# Altium PCB PCB1.PcbDoc
Units mm, origin at the board's own origin, x right, y up, seen from the top; angles counter-clockwise.
Board outline 152.4 x 101.6 mm, 2 copper layers (Top Layer, Bottom Layer); 129 components, 126 nets, 325 pads, 0 vias.
Unrouted connection lines stored in the file: 187.
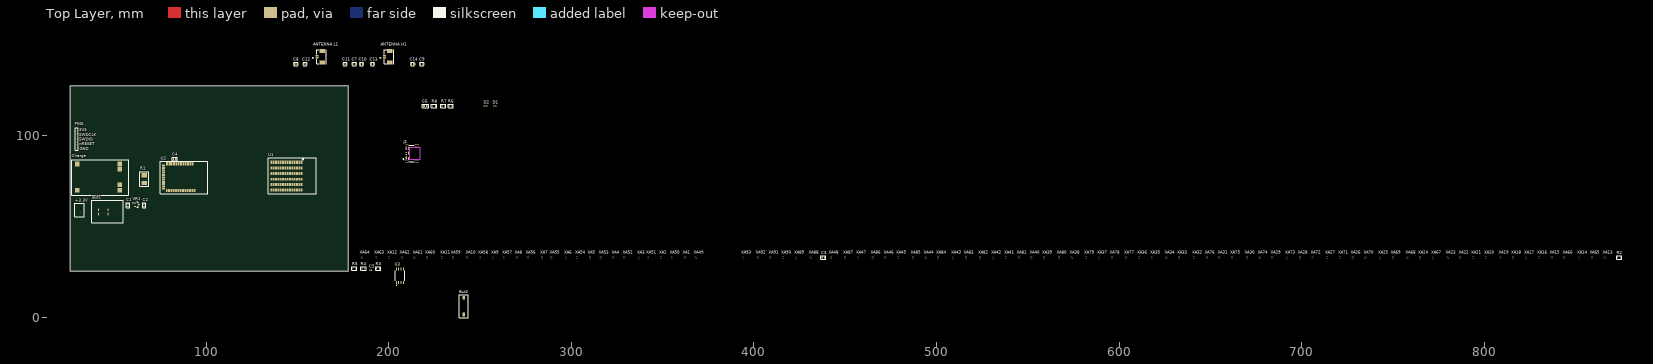
[diagram p0: Top Layer view]
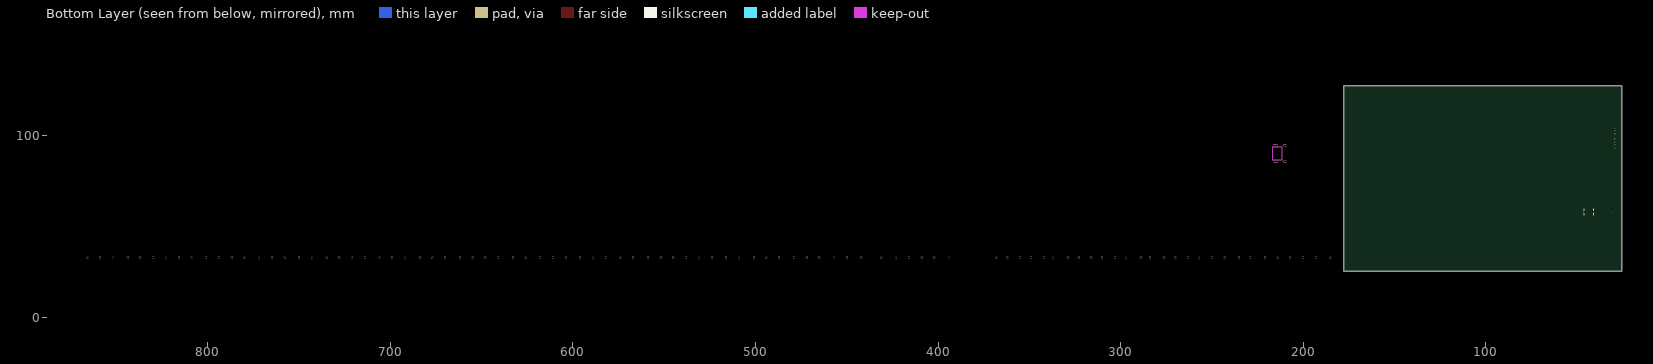
[diagram p1: Bottom Layer view, seen from below]

## Layer stack, top to bottom
Top Solder: solder mask 0.0254, SM-001, Dk 4
Top Layer: signal copper 0.018
Dielectric 1: prepreg 0.32, FR-4, Dk 4.8
Bottom Layer: signal copper 0.018
Bottom Solder: solder mask 0.0254, SM-001, Dk 4

## Board outline
25.4,25.4 177.8,25.4 177.8,127 25.4,127

## Design rules (kind name [scope] priority, off if disabled: settings)
AcuteAngle [All] p1: minimum=3.50000000000000E+0001 checktracksonly=FALSE
BoardOutlineClearance "BoardOutlineClearance 1" [All] p1: gap=0.25 ignorepadtopadclearanceinfootprint=FALSE except(0: Arc-SplitContinuation Track-SplitContinuation SMDPad-SplitContinuation THPad-SplitContinuation Via-SplitContinuation Fill-SplitContinuation Poly-SplitContinuation Region-SplitContinuation Text-SplitContinuation) // Milling
BoardOutlineClearance "BoardOutlineClearance 2" [All] p2 off: gap=0.4 ignorepadtopadclearanceinfootprint=FALSE except(0: Arc-SplitContinuation Track-SplitContinuation SMDPad-SplitContinuation THPad-SplitContinuation Via-SplitContinuation Fill-SplitContinuation Poly-SplitContinuation Region-SplitContinuation Text-SplitContinuation) // V-Cut
Clearance "Clearance-1 1/2 Oz" [All] p1: gap=0.125 ignorepadtopadclearanceinfootprint=FALSE except(0.2: Arc-Fill Arc-Poly Track-Fill Track-Poly SMDPad-SMDPad SMDPad-Fill SMDPad-Poly THPad-Fill THPad-Poly Via-Fill Via-Poly Fill-Fill Fill-Poly Poly-Poly Poly-Region Poly-Text; 0.25: Arc-Hole Track-Hole SMDPad-Hole THPad-Hole Via-Hole Fill-Hole Poly-Hole Region-Hole Text-Hole) // Standart
Clearance "Clearance-2 1/2 Oz" [All] p2 off: gap=0.1 ignorepadtopadclearanceinfootprint=FALSE except(0.15: Arc-Fill Arc-Poly Track-Fill Track-Poly SMDPad-SMDPad SMDPad-Fill SMDPad-Poly THPad-Fill THPad-Poly Via-Fill Via-Poly Fill-Fill Fill-Poly Poly-Poly Poly-Region Poly-Text; 0.25: Arc-Hole Track-Hole SMDPad-Hole THPad-Hole Via-Hole Fill-Hole Poly-Hole Region-Hole Text-Hole) // Advance
DiffPairsRouting "DiffPairsRouting 1 Oz" [All] p1: maxlimit=0.254 minlimit=0.2 mostfreqgap=0.254 toplayer_minwidth=0.2 toplayer_maxwidth=0.381 toplayer_prefwidth=0.381 bottomlayer_minwidth=0.2 bottomlayer_maxwidth=0.381 bottomlayer_prefwidth=0.381 maxuncoupledlength=12.7
DiffPairsRouting "DiffPairsRouting 1/2 Oz" [All] p2: maxlimit=0.254 minlimit=0.1 mostfreqgap=0.254 toplayer_minwidth=0.1 toplayer_maxwidth=0.381 toplayer_prefwidth=0.381 bottomlayer_minwidth=0.1 bottomlayer_maxwidth=0.381 bottomlayer_prefwidth=0.381 maxuncoupledlength=12.7
HoleSize "Minimum HoleSize" [IsPad] p1: absolutevalues=TRUE maxlimit=5.9 minlimit=0.6 maxpercent=80.000 minpercent=20.000
HoleSize "Minimum HoleSize VIA 1" [IsVia] p2: absolutevalues=TRUE maxlimit=5.9 minlimit=0.3 maxpercent=80.000 minpercent=20.000 // Standart
HoleSize "Minimum HoleSize VIA 2" [IsVia] p3 off: absolutevalues=TRUE maxlimit=5.9 minlimit=0.2 maxpercent=80.000 minpercent=20.000 // Advance
HoleToHoleClearance Hole2HoleClearance [All] p1: gap=0.25 allowstackedmicrovias=FALSE
MinimumAnnularRing "Minimum AR VIA Standart" [IsVia] p1: minimumring=0.15
MinimumAnnularRing "Minimum AR PAD Standart" [IsPAD] p2: minimumring=0.2
MinimumAnnularRing "Minimum AR VIA Advance" [IsVia] p3 off: minimumring=0.1
MinimumAnnularRing "Minimum AR PAD Advance" [IsPAD] p4 off: minimumring=0.15
MinimumSolderMaskSliver "SolderMask Bridge Standart" [All] p1: minsoldermaskwidth=0.15 // All Masks
MinimumSolderMaskSliver "SolderMask Bridge Advance" [All] p2 off: minsoldermaskwidth=0.1 // Mask LDI
PlaneClearance "PlaneClearance-1 1/2 Oz" [All] p1: clearance=0.2 // Standart
PlaneClearance "PlaneClearance-2 1/2 Oz" [All] p2 off: clearance=0.15 // Advance
PlaneConnect "TermalConnect-1 1/2 Oz" [All] p1: planeconnectstyle=Relief reliefexpansion=0.2 reliefentries=4 reliefconductorwidth=0.2 reliefairgap=0.2 // Standart
PlaneConnect "TermalConnect-2 1/2 Oz" [All] p2 off: pad.planeconnectstyle=Relief pad.reliefexpansion=0.15 pad.reliefentries=4 pad.reliefconductorwidth=0.15 pad.reliefairgap=0.15 via.planeconnectstyle=Direct via.reliefexpansion=0.15 via.reliefentries=4 via.reliefconductorwidth=0.15 via.reliefairgap=0.15 // Advance
PolygonConnect "PolygonConnect-1 1/2 Oz" [All] p1: thpad.connectstyle=Relief thpad.reliefconductorwidth=0.15 thpad.reliefentries=4 thpad.polygonreliefangle="90 Angle" thpad.airgapwidth=0.2 smdpad.connectstyle=Relief smdpad.reliefconductorwidth=0.2 smdpad.reliefentries=4 smdpad.polygonreliefangle="90 Angle" smdpad.airgapwidth=0.2 via.connectstyle=Direct via.reliefconductorwidth=0.254 via.reliefentries=4 via.polygonreliefangle="90 Angle" via.airgapwidth=0.254 // Standart
PolygonConnect "PolygonConnect-2 1/2 Oz" [All] p2 off: thpad.connectstyle=Relief thpad.reliefconductorwidth=0.125 thpad.reliefentries=4 thpad.polygonreliefangle="90 Angle" thpad.airgapwidth=0.15 smdpad.connectstyle=Relief smdpad.reliefconductorwidth=0.125 smdpad.reliefentries=4 smdpad.polygonreliefangle="90 Angle" smdpad.airgapwidth=0.15 via.connectstyle=Direct via.reliefconductorwidth=0.254 via.reliefentries=4 via.polygonreliefangle="90 Angle" via.airgapwidth=0.254 // Advance
RoutingCorners [All] p1 off: cornerstyle=45-Degree minsetback=2.54 maxsetback=2.54
RoutingVias [All] p1: holewidth=0.3 width=0.6 viastyle="Through Hole" minholewidth=0.3 minwidth=0.6 maxholewidth=5.9 maxwidth=6.4
SilkToSilkClearance Silk2SilkClearance [All] p1 off: silktosilkclearance=0.15
SilkToSolderMaskClearance Silk2SolderMaskClearance [IsPad] p1 off: minsilkscreentomaskgap=0.15 clearancetoexposedcopper=TRUE
SolderMaskExpansion SolderMaskExpansion-1 [All] p1: expansion=0.05 istentingtop=FALSE // Standart
SolderMaskExpansion "SolderMaskExpansion LDI" [All] p2 off: expansion=0.025 istentingtop=FALSE // Advance
SupplyNets "Schematic Supply Nets" [InNet('GND')] p1: voltage=0.000
UnRoutedNet [All] p1: checkbadconnections=TRUE
Width "Width 1/2 Oz" [All] p1: maxlimit=10 minlimit=0.125 preferedwidth=0.125 minimp=50.000000 maximp=50.000000 favimp=50.000000 checkconnectedcopper=TRUE
20 further rules are at their usual default settings.

## Classes and differential pairs
differential pair class USB: DATA
component class U?: +3.3V But1 C1 C2 Charge R1 VR1
differential pair DATA: +DATA_P -DATA_N

## Components (designator, comment, footprint, x,y, rotation, side; value= is the part's Value field where it differs from the comment)
+3.3V "Battery" "Battery connect" 30.473,59.004 r90 top
"ANTENNA H1" "MOLEX 532610271" MOLEX_532610271 200,143.001 r90 top
"ANTENNA L1" "MOLEX 532610271" MOLEX_532610271 163,143.001 r90 top
But1 "SMRS-101-1C2" Button 43.5,58 r0 top
But2 "RES BUT" "RES BUT" 241,6.377 r90 top
C1 "10 мкФ" "Murata GRM21BR60J106K" 57,61.65 r270 top
C2 "10 мкФ" "Murata GRM21BR60J106K" 66,61.65 r270 top
C3 "100 пФ" "Murata GRM2165C1H101J" 438,33 r0 top
C4 "100 пФ" "Murata GRM2165C1H101J" 82.65,87 r180 top
C5 "100 нФ" CAPC1005X22N 190,26 r0 top
C6 "4.7 нФ" "WURTH 885012206012" 220,116.001 r0 top
C7 "TBD" CAPC2012X88N 181,139.001 r0 top
C8 "TBD" CAPC2012X88N 149,139.001 r0 top
C9 "TBD" CAPC2012X88N 218,139.001 r0 top
C10 "TBD" CAPC2012X88N 185,139.001 r0 top
C11 "TBD" CAPC2012X88N 176,139.001 r0 top
C12 "TBD" CAPC2012X88N 154,139.001 r0 top
C13 "TBD" CAPC2012X88N 191,139.001 r0 top
C14 "TBD" CAPC2012X88N 213,139.001 r0 top
Charge "TP4056" TP4056 41,77 r270 top
D1 "PESD0402-140" DIO_PESD0402-140 258,116.001 r0 top
D2 "PESD0402-140" DIO_PESD0402-140 253,116.001 r0 top
J1 "USB-C 1054500101" MOLEX_1054500101 217,90 r90 top
PINS "PLS-4" "PLS-4 (DS-1021-1x4)" 29,98 r270 top
R1 "0.001 Ом" "Resistor 0.001" 66,76 r90 top
R2 "10 кОм" "Yageo RC0805JR-0710KL" 874,33 r0 top
R3 "10 кОм" "Yageo RC0805JR-0710KL" 194,27 r0 top
R4 "22 Ом" CR0805-JW-220ELF 186,27 r0 top
R5 "10 кОм" "Yageo RC0805JR-0710KL" 181,27 r0 top
R6 "5.1 кОм" RC0805FR-075K1L 233,116.001 r0 top
R7 "5.1 кОм" RC0805FR-075K1L 229,116.001 r0 top
R8 "1 МОм" RC0805FR-071ML 224,116.001 r0 top
U1 "HOLYIOT NRF54H20" "HOLYIOT NRF54H20" 143.905,77.549 r270 top
U2 "HOLYIOT NRF54L15" "HOLYIOT NRF54L15" 85,77 r270 top
U3 "W25Q128FVSIG" SOIC127P790X216-8N 206,23 r90 top
VR1 "MCP1700T-3302E_TT" SOT95P237X112-3N 62,62 r0 top
XA1 "PLS-1 (Ningbo Xinlaiya)" PLS-1 362,33 r0 top
XA2 "PLS-1 (Ningbo Xinlaiya)" PLS-1 349,33 r0 top
XA3 "PLS-1 (Ningbo Xinlaiya)" PLS-1 337,33 r0 top
XA4 "PLS-1 (Ningbo Xinlaiya)" PLS-1 323,33 r0 top
XA5 "PLS-1 (Ningbo Xinlaiya)" PLS-1 310,33 r0 top
XA6 "PLS-1 (Ningbo Xinlaiya)" PLS-1 297,33 r0 top
XA7 "PLS-1 (Ningbo Xinlaiya)" PLS-1 284,33 r0 top
XA8 "PLS-1 (Ningbo Xinlaiya)" PLS-1 270,33 r0 top
XA9 "PLS-1 (Ningbo Xinlaiya)" PLS-1 257,33 r0 top
XA10 "PLS-1 (Ningbo Xinlaiya)" PLS-1 243,33 r90 top
XA11 "PLS-1 (Ningbo Xinlaiya)" PLS-1 229,33 r90 top
XA12 "PLS-1 (Ningbo Xinlaiya)" PLS-1 200,33 r90 top
XA13 "PLS-1 (Ningbo Xinlaiya)" PLS-1 866,33 r90 top
XA14 "PLS-1 (Ningbo Xinlaiya)" PLS-1 852,33 r90 top
XA15 "PLS-1 (Ningbo Xinlaiya)" PLS-1 837,33 r90 top
XA16 "PLS-1 (Ningbo Xinlaiya)" PLS-1 830,33 r90 top
XA17 "PLS-1 (Ningbo Xinlaiya)" PLS-1 823,33 r90 top
XA18 "PLS-1 (Ningbo Xinlaiya)" PLS-1 816,33 r90 top
XA19 "PLS-1 (Ningbo Xinlaiya)" PLS-1 809,33 r90 top
XA20 "PLS-1 (Ningbo Xinlaiya)" PLS-1 801,33 r90 top
XA21 "PLS-1 (Ningbo Xinlaiya)" PLS-1 794,33 r90 top
XA22 "PLS-1 (Ningbo Xinlaiya)" PLS-1 787,33 r90 top
XA23 "PLS-1 (Ningbo Xinlaiya)" PLS-1 780,33 r90 top
XA24 "PLS-1 (Ningbo Xinlaiya)" PLS-1 765,33 r90 top
XA25 "PLS-1 (Ningbo Xinlaiya)" PLS-1 743,33 r90 top
XA26 "PLS-1 (Ningbo Xinlaiya)" PLS-1 728,33 r90 top
XA27 "PLS-1 (Ningbo Xinlaiya)" PLS-1 714,33 r90 top
XA28 "PLS-1 (Ningbo Xinlaiya)" PLS-1 699,33 r90 top
XA29 "PLS-1 (Ningbo Xinlaiya)" PLS-1 684,33 r90 top
XA30 "PLS-1 (Ningbo Xinlaiya)" PLS-1 670,33 r90 top
XA31 "PLS-1 (Ningbo Xinlaiya)" PLS-1 655,33 r90 top
XA32 "PLS-1 (Ningbo Xinlaiya)" PLS-1 641,33 r90 top
XA33 "PLS-1 (Ningbo Xinlaiya)" PLS-1 633,33 r90 top
XA34 "PLS-1 (Ningbo Xinlaiya)" PLS-1 626,33 r90 top
XA35 "PLS-1 (Ningbo Xinlaiya)" PLS-1 618,33 r90 top
XA36 "PLS-1 (Ningbo Xinlaiya)" PLS-1 611,33 r90 top
XA37 "PLS-1 (Ningbo Xinlaiya)" PLS-1 589,33 r90 top
XA38 "PLS-1 (Ningbo Xinlaiya)" PLS-1 574,33 r90 top
XA39 "PLS-1 (Ningbo Xinlaiya)" PLS-1 559,33 r90 top
XA40 "PLS-1 (Ningbo Xinlaiya)" PLS-1 552,33 r90 top
XA41 "PLS-1 (Ningbo Xinlaiya)" PLS-1 538,33 r90 top
XA42 "PLS-1 (Ningbo Xinlaiya)" PLS-1 531,33 r90 top
XA43 "PLS-1 (Ningbo Xinlaiya)" PLS-1 509,33 r90 top
XA44 "PLS-1 (Ningbo Xinlaiya)" PLS-1 494,33 r90 top
XA45 "PLS-1 (Ningbo Xinlaiya)" PLS-1 479,33 r90 top
XA46 "PLS-1 (Ningbo Xinlaiya)" PLS-1 472,33 r90 top
XA47 "PLS-1 (Ningbo Xinlaiya)" PLS-1 457,33 r90 top
XA48 "PLS-1 (Ningbo Xinlaiya)" PLS-1 442,33 r90 top
XA49 "PLS-1 (Ningbo Xinlaiya)" PLS-1 368,33 r90 top
XA50 "PLS-1 (Ningbo Xinlaiya)" PLS-1 355,33 r90 top
XA51 "PLS-1 (Ningbo Xinlaiya)" PLS-1 342,33 r90 top
XA52 "PLS-1 (Ningbo Xinlaiya)" PLS-1 329,33 r90 top
XA53 "PLS-1 (Ningbo Xinlaiya)" PLS-1 316,33 r90 top
XA54 "PLS-1 (Ningbo Xinlaiya)" PLS-1 303,33 r90 top
XA55 "PLS-1 (Ningbo Xinlaiya)" PLS-1 289,33 r90 top
XA56 "PLS-1 (Ningbo Xinlaiya)" PLS-1 276,33 r90 top
XA57 "PLS-1 (Ningbo Xinlaiya)" PLS-1 263,33 r90 top
XA58 "PLS-1 (Ningbo Xinlaiya)" PLS-1 250,33 r90 top
XA59 "PLS-1 (Ningbo Xinlaiya)" PLS-1 235,33 r90 top
XA60 "PLS-1 (Ningbo Xinlaiya)" PLS-1 221,33 r90 top
XA61 "PLS-1 (Ningbo Xinlaiya)" PLS-1 214,33 r90 top
XA62 "PLS-1 (Ningbo Xinlaiya)" PLS-1 207,33 r90 top
XA63 "PLS-1 (Ningbo Xinlaiya)" PLS-1 193,33 r90 top
XA64 "PLS-1 (Ningbo Xinlaiya)" PLS-1 185,33 r90 top
XA65 "PLS-1 (Ningbo Xinlaiya)" PLS-1 859,33 r90 top
XA66 "PLS-1 (Ningbo Xinlaiya)" PLS-1 844,33 r90 top
XA67 "PLS-1 (Ningbo Xinlaiya)" PLS-1 772,33 r90 top
XA68 "PLS-1 (Ningbo Xinlaiya)" PLS-1 758,33 r90 top
XA69 "PLS-1 (Ningbo Xinlaiya)" PLS-1 750,33 r90 top
XA70 "PLS-1 (Ningbo Xinlaiya)" PLS-1 735,33 r90 top
XA71 "PLS-1 (Ningbo Xinlaiya)" PLS-1 721,33 r90 top
XA72 "PLS-1 (Ningbo Xinlaiya)" PLS-1 706,33 r90 top
XA73 "PLS-1 (Ningbo Xinlaiya)" PLS-1 692,33 r90 top
XA74 "PLS-1 (Ningbo Xinlaiya)" PLS-1 677,33 r90 top
XA75 "PLS-1 (Ningbo Xinlaiya)" PLS-1 662,33 r90 top
XA76 "PLS-1 (Ningbo Xinlaiya)" PLS-1 648,33 r90 top
XA77 "PLS-1 (Ningbo Xinlaiya)" PLS-1 604,33 r90 top
XA78 "PLS-1 (Ningbo Xinlaiya)" PLS-1 596,33 r90 top
XA79 "PLS-1 (Ningbo Xinlaiya)" PLS-1 582,33 r90 top
XA80 "PLS-1 (Ningbo Xinlaiya)" PLS-1 567,33 r90 top
XA81 "PLS-1 (Ningbo Xinlaiya)" PLS-1 545,33 r90 top
XA82 "PLS-1 (Ningbo Xinlaiya)" PLS-1 524,33 r90 top
XA83 "PLS-1 (Ningbo Xinlaiya)" PLS-1 516,33 r90 top
XA84 "PLS-1 (Ningbo Xinlaiya)" PLS-1 501,33 r90 top
XA85 "PLS-1 (Ningbo Xinlaiya)" PLS-1 487,33 r90 top
XA86 "PLS-1 (Ningbo Xinlaiya)" PLS-1 465,33 r90 top
XA87 "PLS-1 (Ningbo Xinlaiya)" PLS-1 450,33 r90 top
XA88 "PLS-1 (Ningbo Xinlaiya)" PLS-1 431,33 r90 top
XA89 "PLS-1 (Ningbo Xinlaiya)" PLS-1 423,33 r90 top
XA90 "PLS-1 (Ningbo Xinlaiya)" PLS-1 416,33 r90 top
XA91 "PLS-1 (Ningbo Xinlaiya)" PLS-1 409,33 r90 top
XA92 "PLS-1 (Ningbo Xinlaiya)" PLS-1 402,33 r90 top
XA93 "PLS-1 (Ningbo Xinlaiya)" PLS-1 394,33 r90 top

## Footprints (in the part's own frame and the unit in brackets; to place one, negate y for a bottom-side part, rotate by r counter-clockwise, add the part's x,y. Pads: shape width x height; smd on the part's side, far side on the other; paste and mask are expansions set on the pad)
"Battery connect" [mm]
  round 0.5 hole 0.5: 1(-1,-0.5) 2(0.996,-0.527)
  silkscreen extent -3.75,-2.75 3.75,2.5, body extent -2.95,-2.25 2.95,2.25, height 6.2
Button [mm] "SMRS-101-1C2"
  rect 0.6x3.7 hole 0.6 square: 1(-2.5,0) 2(2.5,0)
  silkscreen extent -6.25,-6 11,6.25, body extent -5.1,-5.25 10.1,5.25, height 13.6
CAPC1005X22N [mm]
  rect 0.54x0.6 smd paste+0 mask+0.102: 1(-0.432,0) 2(0.432,0)
  body extent -0.5,-0.25 0.5,0.25, height 0.2
CAPC2012X88N [mm]
  rrect25% 1.16x1.47 smd: 1(-0.875,0) 2(0.875,0)
  silkscreen extent -1,-0.91 1,0.91, body extent -1,-0.63 1,0.63, height 1.1
CR0805-JW-220ELF [mm]
  rect 0.4x1.25 smd: 1(-0.8,0) 2(0.8,0)
  silkscreen extent -1.55,-1 1.7,1, body extent -1.02,-0.62 0.98,0.63, height 0.6
DIO_PESD0402-140 [mm]
  rect 0.85x0.65 smd paste+0 mask+0.102: 1(-0.625,0) 2(0.625,0)
  body extent -0.5,-0.25 0.5,0.25, height 0.43
"HOLYIOT NRF54H20" [mm]
  rect 1.8x1 smd: 1(-7.6,8.255) 2(-7.6,6.985) 3(-7.6,5.715) 4(-7.6,4.445) 5(-7.6,3.175) 6(-7.6,1.905) 7(-7.6,0.635) 8(-7.6,-0.635) 9(-7.6,-1.905) 10(-7.6,-3.175) 11(-7.6,-4.445) 12(-7.6,-5.715) 13(-7.6,-6.985) 14(-7.6,-8.255) 15(-4.45,-8.255) 16(-4.45,-6.985) 17(-4.45,-5.715) 18(-4.45,-4.445) 19(-4.45,-3.175) 20(-4.45,-1.905) 21(-4.45,-0.635) 22(-4.45,0.635) 23(-4.45,1.905) 24(-4.45,3.175) 25(-4.45,4.445) 26(-4.45,5.715) 27(-4.45,6.985) 28(-4.45,8.255) 57(4.525,8.255) 58(4.525,6.985) 59(4.525,5.715) 60(4.525,4.445) 61(4.525,3.175) 62(4.525,1.905) 63(4.525,0.635) 64(4.525,-0.635) 65(4.525,-1.905) 66(4.525,-3.175) 67(4.525,-4.445) 68(4.525,-5.715) 69(4.525,-6.985) 70(4.525,-8.255) 71(7.6,-8.255) 72(7.6,-6.985) 73(7.6,-5.715) 74(7.6,-4.445) 75(7.6,-3.175) 76(7.6,-1.905) 77(7.6,-0.635) 78(7.6,0.635) 79(7.6,1.905) 80(7.6,3.175) 81(7.6,4.445) 82(7.6,5.715) 83(7.6,6.985) 84(7.6,8.255)
  rect 1.5x1 smd: 29(-1.451,8.255) 30(-1.451,6.985) 31(-1.451,5.715) 32(-1.451,4.445) 33(-1.451,3.175) 34(-1.451,1.905) 35(-1.451,0.635) 36(-1.451,-0.635) 37(-1.451,-1.905) 38(-1.451,-3.175) 39(-1.451,-4.445) 40(-1.451,-5.715) 41(-1.451,-6.985) 42(-1.451,-8.255) 43(1.674,-8.255) 44(1.674,-6.985) 45(1.674,-5.715) 46(1.674,-4.445) 47(1.674,-3.175) 48(1.674,-1.905) 49(1.674,-0.635) 50(1.674,0.635) 51(1.674,1.905) 52(1.674,3.175) 53(1.674,4.445) 54(1.674,5.715) 55(1.674,6.985) 56(1.674,8.255)
  silkscreen extent -10,-10 9.5,16.25, body extent -8.26,-9.25 8.26,15.25, height 2.89
"HOLYIOT NRF54L15" [mm]
  rect 1.8x1 smd: 1(-7.32,7.412) 2(-7.32,6.142) 3(-7.32,4.872) 4(-7.32,3.602) 5(-7.32,2.332) 6(-7.32,1.062) 7(-7.32,-0.208) 8(-7.32,-1.478) 9(-7.32,-2.748) 10(-7.32,-4.018) 11(-7.32,-5.288) 12(-7.32,-6.558) 24(7.32,-6.753) 25(7.32,-5.478) 26(7.32,-4.208) 27(7.32,-2.938) 28(7.32,-1.668) 29(7.32,-0.398) 30(7.32,0.872) 31(7.32,2.142) 32(7.32,3.412) 33(7.32,4.682) 34(7.32,5.952) 35(7.32,7.222) 36(7.32,8.492)
  rect 1x1.8 smd: 13(-6.355,-8.492) 14(-5.08,-8.492) 15(-3.81,-8.492) 16(-2.54,-8.492) 17(-1.27,-8.492) 18(0,-8.492) 19(1.27,-8.492) 20(2.54,-8.492) 21(3.81,-8.492) 22(5.08,-8.492) 23(6.345,-8.492)
  silkscreen extent -8.65,-10.15 8.95,15.65, body extent -7.84,-8.97 7.79,15.07, height 2.43
MOLEX_532610271 [mm]
  rect 0.8x1.6 smd mask+0.076: 1(-0.625,2.4) 2(0.625,2.4)
  rect 2.1x3 smd mask+0.076: S1(-3.175,-0.5) S2(3.175,-0.5)
  silkscreen extent -3.83,-2.6 3.83,4.64
MOLEX_1054500101 [mm]
  rect 0.298x0.7 smd mask+0.064: A1(-3,7.54) A2(-2.5,7.54) A3(-2,7.54) A4(-1.5,7.54) A5(-1,7.54) A6(-0.5,7.54) A7(0.5,7.54) A8(1,7.54) A9(1.5,7.54) A10(2,7.54) A11(2.5,7.54) A12(3,7.54) B2(2.25,6.24) B3(1.75,6.24) B4(1.25,6.24) B5(0.75,6.24) B6(0.25,6.24) B7(-0.25,6.24) B8(-0.75,6.24) B9(-1.25,6.24) B10(-1.75,6.24) B11(-2.25,6.24)
  rect 0.998x0.7 smd mask+0.064: B1(3.1,6.24) B12(-3.1,6.24)
  oval 1.036x2.1 hole 0.6 slot 1.6 at 90 deg mask+0.064: SH1(-4.32,7.13) SH2(4.32,7.13)
  oval 1.1x2.6 hole 0.6 slot 2.1 at 90 deg mask+0.064: SH3(-4.32,1.77) SH4(4.32,1.77)
  Keep-Out Layer region: 3.5,0 -3.5,0 -3.5,5.65 3.5,5.65
  silkscreen extent -4.62,3.42 4.62,9.45
"Murata GRM21BR60J106K" [mm]
  rect 0.7x1.25 smd: 1(-0.65,0) 2(0.65,0)
  silkscreen extent -1.35,-0.9 1.35,0.9, body extent -1,-0.7 1,0.75, height 1.24
"Murata GRM2165C1H101J" [mm]
  rect 0.7x1.25 smd: 1(-0.65,0) 2(0.65,0)
  silkscreen extent -1.3,-0.9 1.4,0.9, body extent -1,-0.7 1,0.75, height 1.24
PLS-1 [mm]
  round 1.02 hole 1.02: 1(0,0)
  body extent -1.27,-1.27 1.27,1.27, height 16.06
"PLS-4 (DS-1021-1x4)" [mm]
  round 1.02 hole 1.02: 1(-5.08,0) 2(-2.54,0) 3(0,0) 4(2.54,0) 5(5.08,0)
  silkscreen extent -6.08,-0.9 6.29,0.88, body extent -6.4,-1.26 6.3,1.28, height 8.6
RC0805FR-071ML [mm]
  rect 0.4x1.25 smd: 1(0,0) 2(1.6,0)
  silkscreen extent -0.75,-1 2.25,1, body extent -0.2,-0.61 1.8,0.64, height 0.6
RC0805FR-075K1L [mm]
  rect 0.4x1.25 smd: 1(0,0) 2(1.6,0)
  silkscreen extent -0.5,-1 2.25,1, body extent -0.21,-0.64 1.79,0.61, height 0.6
"RES BUT" [mm]
  rect 2.1x1.6 smd: 1(-4.55,0) 2(4.55,0)
  silkscreen extent -6.25,-2.5 6.25,2.5, body extent -4.98,-1.75 4.98,1.75, height 4.4
"Resistor 0.001" [mm]
  rect 2.21x3.18 smd: 1(-2.07,0) 2(2.07,0)
  silkscreen extent -4.08,-2.5 4.09,2.5, body extent -3.17,-1.59 3.17,1.59, height 0.88
SOIC127P790X216-8N [mm]
  rrect25% 1.61x0.58 smd: 1(-3.605,1.905) 2(-3.605,0.635) 3(-3.605,-0.635) 4(-3.605,-1.905) 5(3.605,-1.905) 6(3.605,-0.635) 7(3.605,0.635) 8(3.605,1.905)
  silkscreen extent -5.31,-2.64 2.64,2.64, body extent -3.95,-2.64 3.95,2.64, height 2.16
SOT95P237X112-3N [mm]
  rrect25% 1.22x0.62 smd: 1(-1.065,0.95) 2(-1.065,-0.95) 3(1.065,0)
  silkscreen extent -2.46,-1.43 0.64,1.43, body extent -1.18,-1.45 1.18,1.45, height 1.12
TP4056 [mm]
  rect 2.5x2.5 smd: 1(-7.25,11.625) 2(-4.25,11.625) 3(4.25,11.625) 4(7.25,11.625) 5(-7.25,-11.625) 6(7.25,-11.625)
  silkscreen extent -9.5,-14.87 9.75,16.13, body extent -8.7,-14.17 8.7,15.13, height 4.14
"WURTH 885012206012" [mm] "Chip Capacitor, 2-Leads, Body 1,60x0,80mm, IPC Medium Density"
  rect 0.9x0.95 smd: 1(-0.775,0) 2(0.775,0)
  silkscreen extent -1.75,-1 1.75,1, body extent -0.8,-0.4 0.8,0.4, height 0.6
"Yageo RC0805JR-0710KL" [mm]
  rect 0.25x1.25 smd: 1(-0.825,0) 2(0.825,0)
  silkscreen extent -1.32,-1 1.43,1, body extent -1,-0.63 1,0.63, height 0.6

## Part data
"ANTENNA H1" "ANTENNA L1": library part 532610271, "Connector Header Surface Mount, Right Angle 2 position 0.049 (1.25mm)", Package=None, Availability="In Stock", Check_prices=https://www.snapeda.com/parts/532610271/Molex/view-part/?ref=eda, MF=Molex, MP=532610271, Price=None, Purchase-URL=https://pricing.snapeda.com/search/part/532610271/?ref=eda, SnapEDA_Link=https://www.snapeda.com/parts/532610271/Molex/view-part/?ref=snap
But1: library part Button
C1 C2: library part "Murata GRM21BR60J106K", "Murata GRM21BR60J106K"
C3 C4: library part "Murata GRM2165C1H101J", "Murata GRM2165C1H101J"
C5: library part GRM152R60J104KE19D, "SMD Capacitor X5R(EIA) with Capacitance: 0.10uF Tol. 10%. Rated Voltage: 6.3Vdc", Package="1005 Murata", Check_prices=https://www.snapeda.com/parts/GRM152R60J104KE19D/Murata/view-part/?ref=eda, MF=Murata, MP=GRM152R60J104KE19D, SnapEDA_Link=https://www.snapeda.com/parts/GRM152R60J104KE19D/Murata/view-part/?ref=snap
C6: library part "WURTH 885012206012"
C7 C8 C9 C10 C11 C12 C13 C14: library part C0805C473K1RACTU, "0805 C0G/NP0 ceramic capacitor for nfc fix", Package="805-2 KEMET", Check_prices=https://www.snapeda.com/parts/C0805C473K1RACTU/KEMET/view-part/?ref=eda, MF=KEMET, MP=C0805C473K1RACTU, SnapEDA_Link=https://www.snapeda.com/parts/C0805C473K1RACTU/KEMET/view-part/?ref=snap
D1 D2: "40V Clamp - Ipp Tvs Diode Surface Mount 0402", Package="0402 Littelfuse Inc.", Check_prices=https://www.snapeda.com/parts/PESD0402-140/Littelfuse/view-part/?ref=eda, MF="Littelfuse Inc.", MP=PESD0402-140, SnapEDA_Link=https://www.snapeda.com/parts/PESD0402-140/Littelfuse/view-part/?ref=snap
J1: library part 1054500101, "USB-C (USB TYPE-C) USB 3.2 Gen 2 (USB 3.1 Gen 2, Superspeed + (USB 3.1)) Receptacle Connector 24 Position Surface Mount, Right Angle; Through Hole", Package=None, Check_prices=https://www.snapeda.com/parts/1054500101/Molex/view-part/?ref=eda, MF=Molex, MP=1054500101, SnapEDA_Link=https://www.snapeda.com/parts/1054500101/Molex/view-part/?ref=snap
PINS: library part "PLS-4 (DS-1021-1x4)"
R1: library part "YAGEO PA2512FKF7W0R001E"
R2 R3 R5: library part "Yageo RC0805JR-0710KL"
R4: library part CR0805-JW-220ELF
R6 R7: library part RC0805FR-075K1L
R8: library part RC0805FR-071ML
U3: library part W25Q128JVSIQ, "FLASH - NOR Memory IC 128Mb (16M x 8) SPI - Quad I/O, QPI, DTR 133 MHz 8-SOIC", Package="SOIC-8 Winbond Electronics", Check_prices=https://www.snapeda.com/parts/W25Q128JVSIQ/Winbond/view-part/?ref=eda, MF="Winbond Electronics", MP=W25Q128JVSIQ, SnapEDA_Link=https://www.snapeda.com/parts/W25Q128JVSIQ/Winbond/view-part/?ref=snap
VR1: "Pwr Sply Func,Voltage Regulator,LDO,SOT-23,PD 369.6mW,VO 3.3V,Regline +/-0.75%/V", Package="SOT-23 Microchip", Check_prices=https://www.snapeda.com/parts/MCP1700T-3302E/TT/Microchip/view-part/?ref=eda, MF=Microchip, MP=MCP1700T-3302E/TT, SnapEDA_Link=https://www.snapeda.com/parts/MCP1700T-3302E/TT/Microchip/view-part/?ref=snap

## Nets (pads, with @x,y where several pads share a name; then routed paths per layer and width w, separated by ;. In a path a pad name is that pad's centre, name@x,y a point inside that pad or via, vN(x,y) a via of type N, cw(c..) or ccw(c..) an arc to the next point about the centre after c; other vN are vias at no path point)
DATA_N: D1.1 J1.A7 J1.B7 U1.78
DATA_P: D2.1 J1.A6 J1.B6 U1.79
GND: "ANTENNA H1.S1" "ANTENNA H1.S2" "ANTENNA L1.S1" "ANTENNA L1.S2" C1.1 C2.1 C3.1 C4.1 C5.1 C6.1 C7.1 C8.2 C9.1 C10.2 Charge.4 D1.2 D2.2 J1.A1 J1.A12 J1.B1 J1.B12 PINS.5 R6.1 R7.2 R8.2 U1.1 U1.4 U1.28 U1.29 U1.58 U2.1 U2.36 U3.4 VR1.1
Net+3.3V_1: +3.3V.1 Charge.3
Net+3.3V_2: +3.3V.2 Charge.2
"NetANTENNA H1_1": "ANTENNA H1.1" C14.1
"NetANTENNA H1_2": "ANTENNA H1.2" C13.1
"NetANTENNA L1_1": "ANTENNA L1.1" C11.1
"NetANTENNA L1_2": "ANTENNA L1.2" C12.1
NetBut1_1: But1.1 Charge.1
NetBut1_2: But1.2 C1.2 VR1.3
NetBut2_2: But2.2 R2.1
NetC2_2: C2.2 R1.1 VR1.2
NetC3_2: C3.2 C4.2 C5.2 PINS.1 R1.2 R2.2 R5.1 U1.2 U2.9 U3.8
NetC6_2: C6.2 J1.SH1 J1.SH2 J1.SH3 J1.SH4 R8.1
NetC7_2: C7.2 C11.2 U2.10
NetC8_1: C8.1 C12.2 U2.11
NetC9_2: C9.2 C14.2 U1.26
NetC10_1: C10.1 C13.2 U1.27
NetJ1_A4: J1.A4 J1.A9 J1.B4 J1.B9 U1.77
NetJ1_A5: J1.A5 R6.2
NetJ1_B5: J1.B5 R7.1
NetR3_1: R3.1 U1.7
NetR3_2: R3.2 U3.1
NetR4_1: R4.1 U1.15
NetR4_2: R4.2 U3.6
NetR5_2: R5.2 U3.7
NetU1_3: U1.3 XA43.1
NetU1_5: U1.5 XA46.1
NetU1_6: U1.6 XA45.1
NetU1_8: U1.8 XA85.1
NetU1_9: U1.9 XA84.1
NetU1_10: U1.10 U3.3
NetU1_11: U1.11 XA83.1
NetU1_12: U1.12 XA82.1
NetU1_13: U1.13 U3.5
NetU1_14: U1.14 XA81.1
NetU1_16: U1.16 XA77.1
NetU1_17: U1.17 XA78.1
NetU1_18: U1.18 XA79.1
NetU1_19: U1.19 XA80.1
NetU1_20: U1.20 U3.2
NetU1_21: U1.21 XA67.1
NetU1_22: U1.22 XA68.1
NetU1_23: U1.23 XA69.1
NetU1_24: U1.24 XA70.1
NetU1_25: U1.25 XA71.1
NetU1_30: U1.30 XA76.1
NetU1_31: U1.31 XA75.1
NetU1_32: U1.32 XA74.1
NetU1_33: U1.33 XA73.1
NetU1_34: U1.34 XA72.1
NetU1_35: U1.35 XA93.1
NetU1_36: U1.36 XA92.1
NetU1_37: U1.37 XA91.1
NetU1_38: U1.38 XA90.1
NetU1_39: U1.39 XA89.1
NetU1_40: U1.40 XA88.1
NetU1_41: U1.41 XA87.1
NetU1_42: U1.42 XA86.1
NetU1_43: U1.43 XA22.1
NetU1_44: U1.44 XA21.1
NetU1_45: U1.45 XA18.1
NetU1_46: U1.46 XA19.1
NetU1_47: U1.47 XA20.1
NetU1_48: U1.48 XA37.1
NetU1_49: U1.49 XA38.1
NetU1_50: U1.50 XA13.1
NetU1_51: U1.51 XA17.1
NetU1_52: U1.52 XA29.1
NetU1_53: U1.53 XA28.1
NetU1_54: U1.54 XA27.1
NetU1_55: U1.55 XA44.1
NetU1_56: U1.56 XA26.1
NetU1_57: U1.57 XA25.1
NetU1_59: U1.59 XA31.1
NetU1_60: U1.60 XA32.1
NetU1_61: U1.61 XA34.1
NetU1_62: U1.62 XA42.1
NetU1_63: U1.63 XA41.1
NetU1_64: U1.64 XA40.1
NetU1_65: U1.65 XA39.1
NetU1_66: U1.66 XA16.1
NetU1_67: U1.67 XA15.1
NetU1_68: U1.68 XA14.1
NetU1_69: U1.69 XA23.1
NetU1_70: U1.70 XA24.1
NetU1_71: U1.71 XA47.1
NetU1_75: U1.75 XA48.1
NetU1_76: U1.76 XA66.1
NetU1_80: U1.80 XA65.1
NetU1_81: U1.81 XA35.1
NetU1_82: U1.82 XA36.1
NetU1_83: U1.83 XA33.1
NetU1_84: U1.84 XA30.1
NetU2_2: U2.2 XA54.1
NetU2_3: U2.3 XA53.1
NetU2_4: U2.4 XA12.1
NetU2_5: U2.5 XA52.1
NetU2_6: U2.6 XA51.1
NetU2_7: U2.7 XA50.1
NetU2_8: U2.8 XA49.1
NetU2_12: U2.12 XA59.1
NetU2_13: U2.13 XA58.1
NetU2_14: U2.14 XA57.1
NetU2_15: U2.15 XA56.1
NetU2_16: U2.16 XA55.1
NetU2_17: U2.17 XA11.1
NetU2_18: U2.18 XA10.1
NetU2_19: U2.19 XA9.1
NetU2_20: U2.20 XA8.1
NetU2_21: U2.21 XA7.1
NetU2_22: U2.22 XA6.1
NetU2_23: U2.23 XA5.1
NetU2_24: U2.24 XA4.1
NetU2_25: U2.25 XA3.1
NetU2_26: U2.26 XA2.1
NetU2_27: U2.27 XA1.1
NetU2_28: U2.28 XA64.1
NetU2_29: U2.29 XA63.1
NetU2_32: U2.32 XA62.1
NetU2_33: U2.33 XA61.1
NetU2_34: U2.34 XA60.1
nRESET: But2.1 PINS.4 U1.72 U2.35
SWDCLK: PINS.2 U1.74 U2.30
SWDIO: PINS.3 U1.73 U2.31
pads on no net: Charge.5 Charge.6 J1.A2 J1.A3 J1.A8 J1.A10 J1.A11 J1.B2 J1.B3 J1.B8 J1.B10 J1.B11

## Text inside footprints (layer, text, board x,y; h text height)
J1: Mechanical 13 "PCB Edge" at 216.73,95.4 h1 r90
PINS: Top Overlay "GND" at 30.65,91.85 h1.52; Top Overlay "nRESET" at 30.475,94.5 h1.52; Top Overlay "SWDIO" at 30.4,96.85 h1.52; Top Overlay "SWDCLK" at 30.3,99.45 h1.52; Top Overlay "3V3" at 30.475,102.1 h1.52